# Altium PCB GPS_PCB.PcbDoc
Units mm, origin at the board's own origin, x right, y up, seen from the top; angles counter-clockwise.
Board outline 31.8 x 40.03 mm, 2 copper layers (Top Layer, Bottom Layer); 34 components, 32 nets, 167 pads, 68 vias.
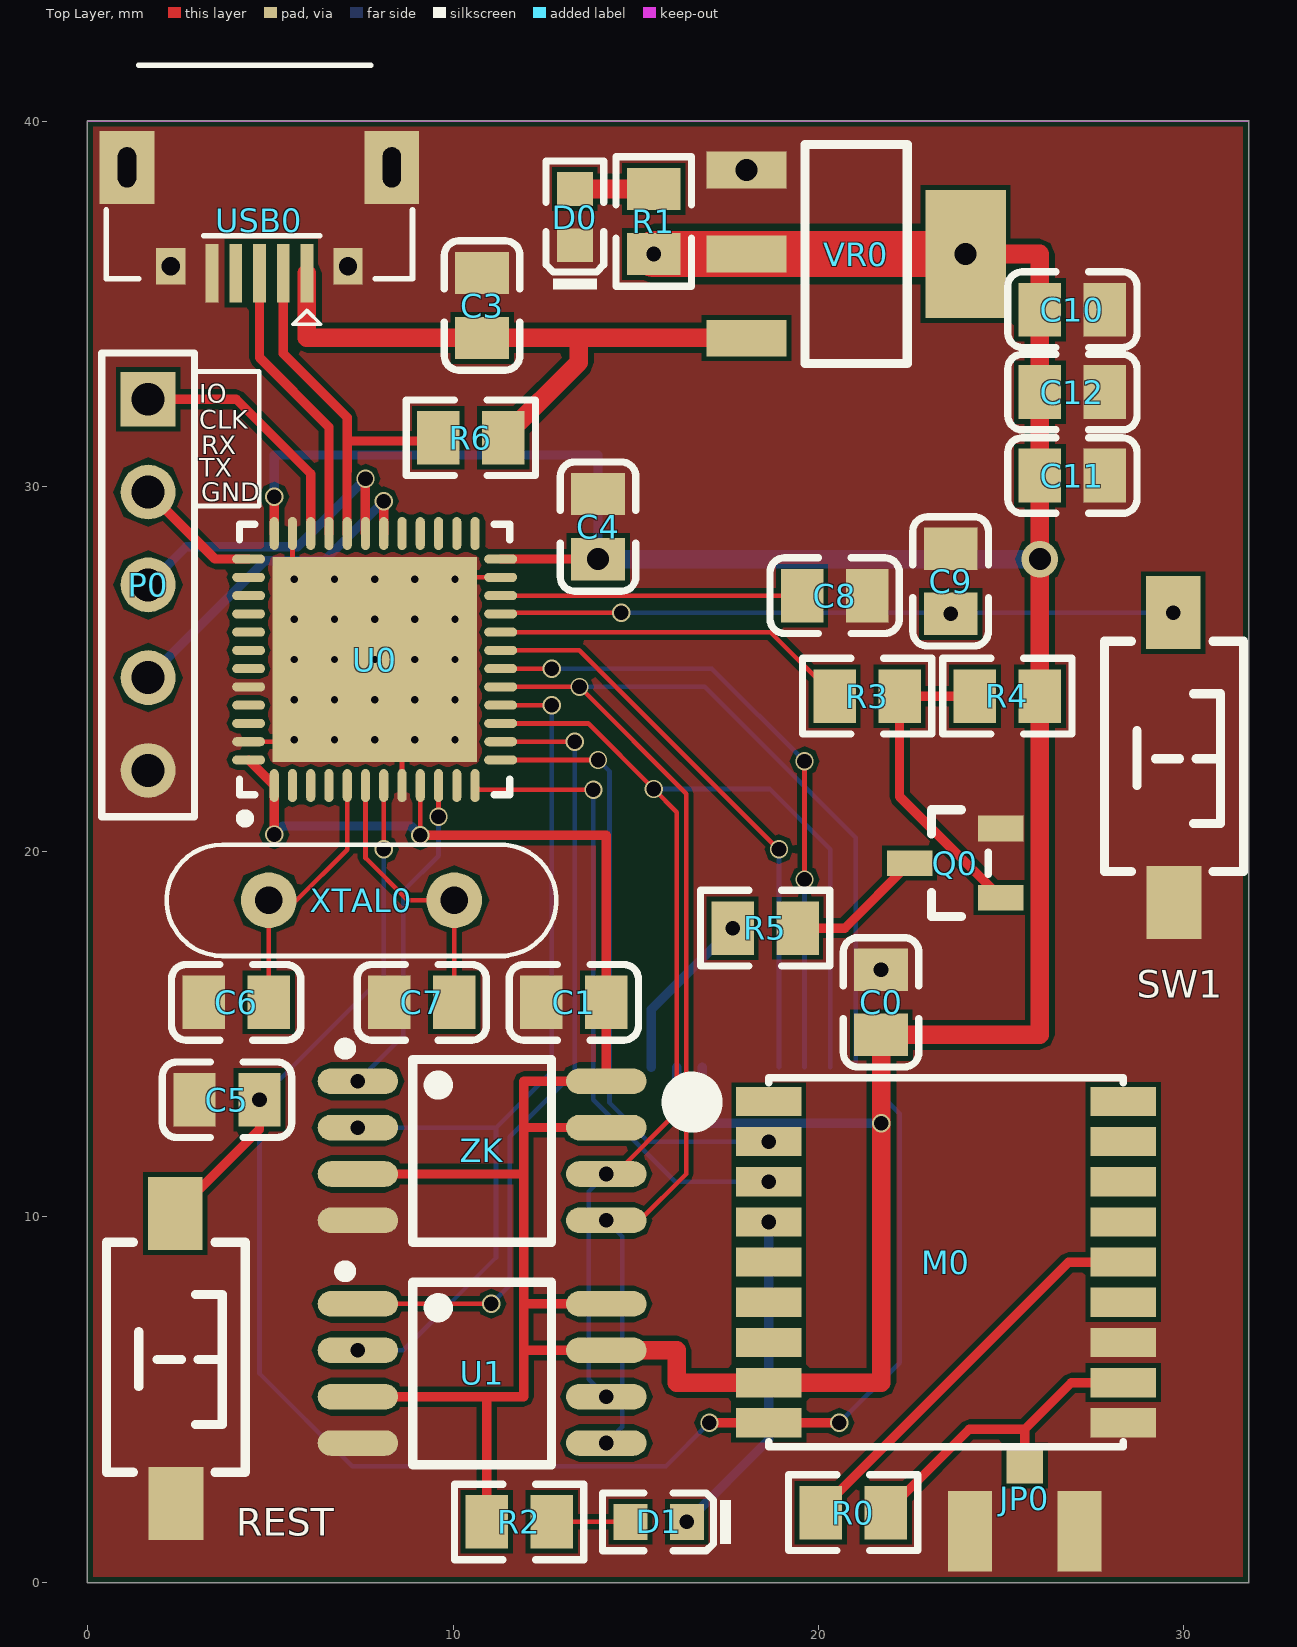
[diagram p0: Top Layer view]
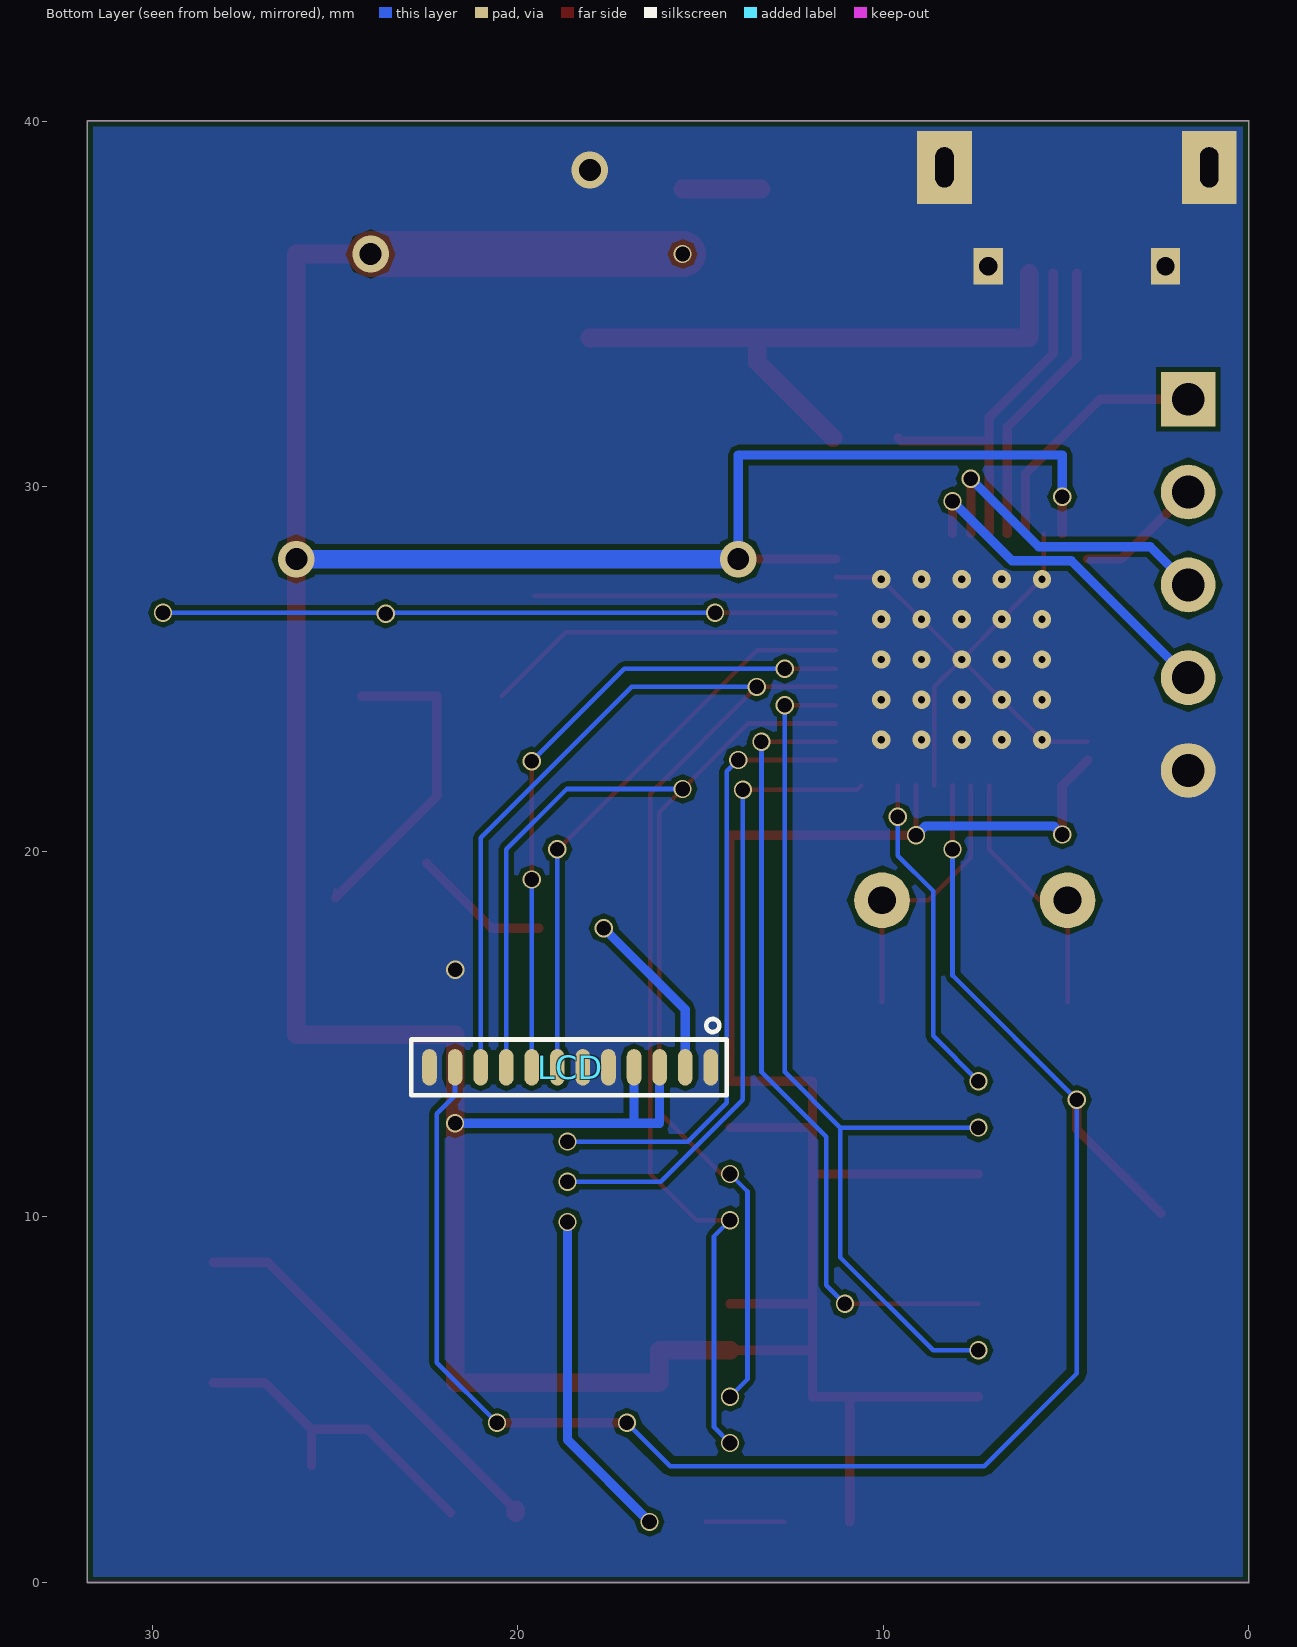
[diagram p1: Bottom Layer view, seen from below]
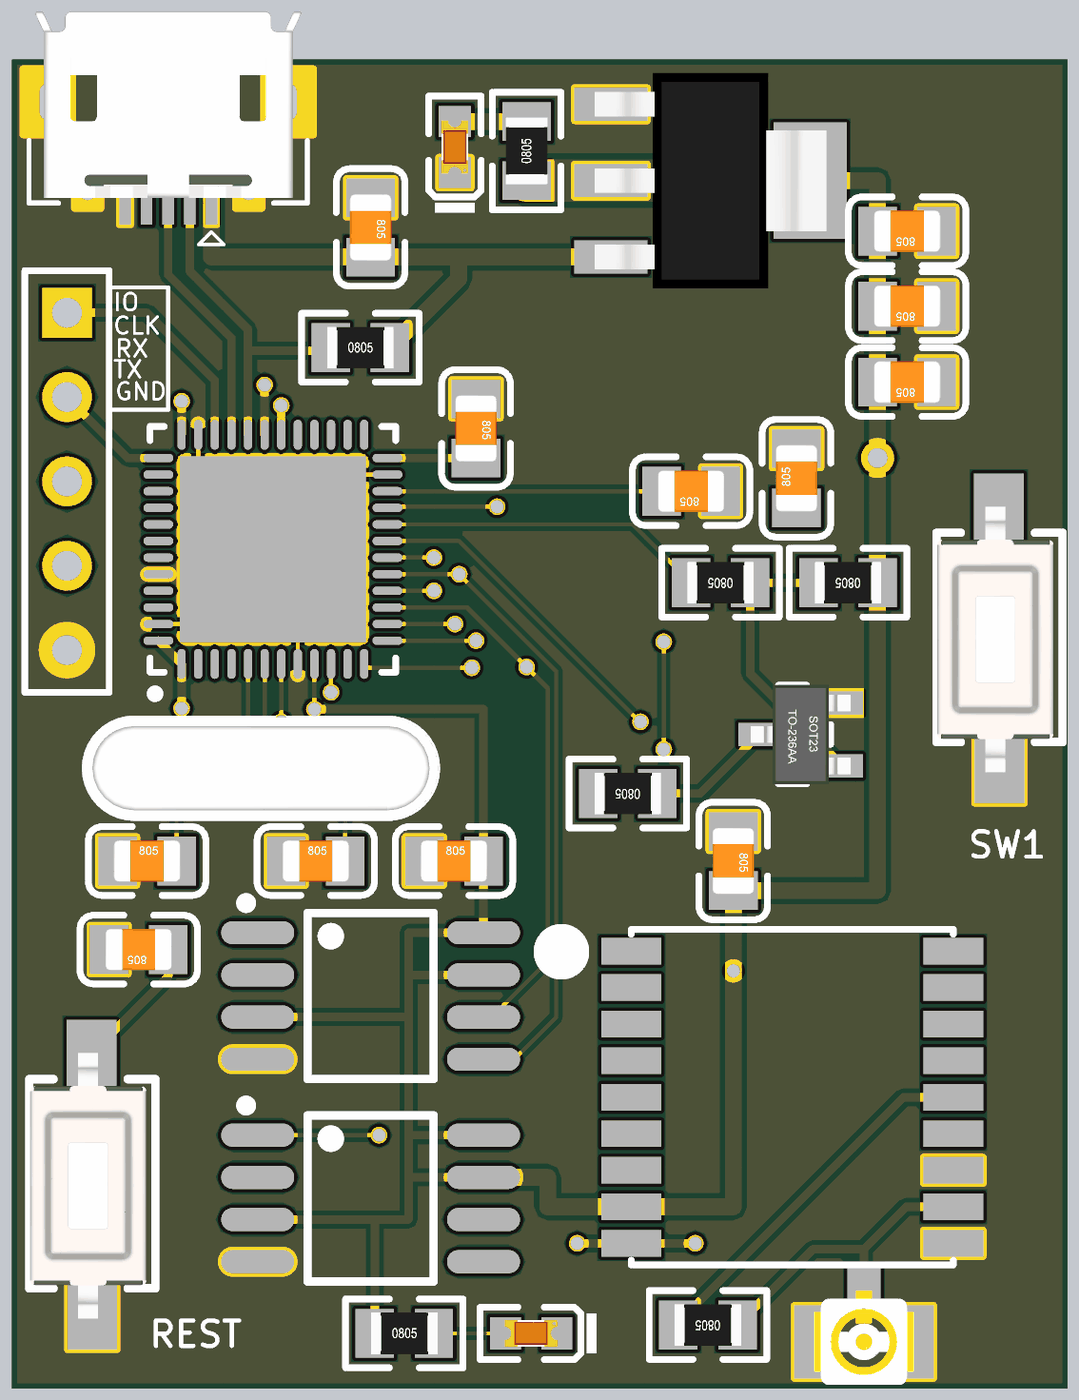
[diagram p2: 3D render of the assembled board from above, using the file's embedded part models]

## Layer stack, top to bottom
Top Solder: solder mask 0.0102, Solder Resist, Dk 3.5
Top Layer: signal copper 0.0356
Dielectric 1: dielectric 0.32, FR-4, Dk 4.8
Bottom Layer: signal copper 0.0356
Bottom Solder: solder mask 0.0102, Solder Resist, Dk 3.5

## Board outline
0,-0.013 cw(c0,0) -0.013,0 -0.013,40 cw(c0,40) 0,40.013 31.778,40.013 cw(c31.778,40) 31.791,40 31.791,0 cw(c31.778,0) 31.778,-0.013

## Design rules (kind name [scope] priority, off if disabled: settings)
Clearance [All] p1: gap=0.127 ignorepadtopadclearanceinfootprint=TRUE
PlaneConnect [All] p1: planeconnectstyle=Direct reliefexpansion=0.508 reliefentries=4 reliefconductorwidth=0.254 reliefairgap=0.254
PolygonConnect [All] p1: connectstyle=Direct reliefconductorwidth=0.254 reliefentries=4 polygonreliefangle="90 Angle" airgapwidth=0.254
RoutingVias [All] p1: holewidth=0.4 width=0.5 viastyle="Through Hole" minholewidth=0.4 minwidth=0.5 maxholewidth=1.5 maxwidth=1
SolderMaskExpansion [All] p1: expansion=0.102
Width [All] p1: maxlimit=1.27 minlimit=0.127 preferedwidth=0.127 minimp=50.000000 maximp=50.000000 favimp=50.000000
29 further rules are at their usual default settings.

## Components (designator, comment, footprint, x,y, rotation, side; value= is the part's Value field where it differs from the comment)
C0 "100n" 0805_C 21.717,15.876 r270 top
C1 "100n" 0805_C 13.305,15.875 r0 top
C3 "100n" 0805_C 10.795,34.953 r270 top
C4 "100n" 0805_C 13.97,28.901 r270 top
C5 "100n" 0805_C 3.81,13.208 r180 top
C6 "20p" 0805_C 4.063,15.875 r0 top
C7 "20p" 0805_C 9.143,15.875 r0 top
C8 "4.7u" 0805_C 20.448,27.011 r180 top
C9 "100n" 0805_C 23.622,27.401 r90 top
C10 "100n" 0805_C 26.956,34.84 r180 top
C11 "100n" 0805_C 26.956,30.297 r180 top
C12 "100n" 0805_C 26.956,32.583 r180 top
D0 "白灯 0603" 0603_LED_S1 13.335,37.373 r90 top
D1 "白灯 0603" 0603_LED_S1 15.629,1.651 r180 top
JP0 "SMA" IPX 25.654,1.397 r180 top
LCD "Header 12" 1.3_inch_LCD 18.223,14.097 r180 bottom
M0 "GP-02" GP-02 23.495,8.763 r0 top
P0 "Header 5" HDR1X5 1.651,32.385 r270 top
Q0 "SS8050 Y1" SOT-23(SOT-23-3) 23.749,19.685 r0 top
R0 "10K" 0805_R 20.955,1.905 r180 top
R1 "390" 0805_R 15.494,37.253 r90 top
R2 "390" 0805_R 11.811,1.651 r0 top
R3 "1K" 0805_R 21.335,24.257 r180 top
R4 "10K" 0805_R 25.175,24.257 r180 top
R5 "10" 0805_R 18.543,17.907 r180 top
R6 "1.5K" 0805_R 10.485,31.332 r0 top
REST "3x6x5" "TSW SMD-3*6*2.5" 2.413,6.096 r270 top (schematic designator SW0)
SW1 "3x6x5" "TSW SMD-3*6*2.5" 29.738,22.547 r270 top
U0 "STM32F401CCU6" STM-UFQFPN48_N 7.853,25.261 r90 top
U1 "W25Q128JVSIQTR" SOIC-8_208mil 10.795,5.715 r270 top
USB0 "USB-5P" USB-MICRO_B 4.699,38.735 r180 top
VR0 "AMS1117-3.3" SOT-223 21.033,36.363 r180 top
XTAL0 "Crystal" XTAL_DIP 4.953,18.669 r0 top
ZK "W25Q128JVSIQTR" SOIC-8_208mil 10.795,11.811 r270 top

## Footprints (in the part's own frame and the unit in brackets; to place one, negate y for a bottom-side part, rotate by r counter-clockwise, add the part's x,y. Pads: shape width x height; smd on the part's side, far side on the other; paste and mask are expansions set on the pad)
1.3_inch_LCD [mm]
  oval 0.4x1 smd: 1(3.5,0) 2(2.8,0) 3(2.1,0) 4(1.4,0) 5(0.7,0) 6(0,0) 7(-0.7,0) 8(-1.4,0) 9(-2.1,0) 10(-2.8,0) 11(-3.5,0) 12(-4.2,0)
  silkscreen extent -4.7,-0.76 3.94,1.32
0603_LED_S1 [mm]
  rect 0.93x0.98 smd: A(0.77,0) K(-0.77,0)
  silkscreen extent -1.98,-0.79 1.54,0.79, body extent -0.8,-0.4 0.8,0.4, height 0.6
0805_C [mm]
  rect 1.16x1.47 smd: 1(-0.89,0) 2(0.89,0)
  silkscreen extent -1.77,-1.04 1.77,1.04, body extent -1,-0.62 1,0.63, height 0.77
0805_R [mm]
  rect 1.16x1.47 smd: 1(-0.89,0) 2(0.89,0)
  silkscreen extent -1.77,-1.04 1.77,1.03, body extent -1,-0.62 1,0.63, height 0.49
GP-02 [mm]
  rect 1.8x0.8 smd: 1(-4.85,4.4) 2(-4.85,3.3) 3(-4.85,2.2) 4(-4.85,1.1) 5(-4.85,0) 6(-4.85,-1.1) 7(-4.85,-2.2) 8(-4.85,-3.3) 9(-4.85,-4.4) 10(4.85,-4.4) 11(4.85,-3.3) 12(4.85,-2.2) 13(4.85,-1.1) 14(4.85,0) 15(4.85,1.1) 16(4.85,2.2) 17(4.85,3.3) 18(4.85,4.4)
  silkscreen extent -7.29,-5.05 4.85,5.05
HDR1X5 [mm] "Connector; Header; 5 Position"
  rect 1.5x1.5 hole 0.9: 1(0,0)
  round 1.5 hole 0.9: 2(2.54,0) 3(5.08,0) 4(7.62,0) 5(10.16,0)
  silkscreen extent -1.27,-1.27 11.43,1.27
IPX [mm]
  rect 1x1 smd: 1(0,-1.8)
  rect 1.2x2.2 smd: 2(-1.5,0) 2(1.5,0)
  body extent -1.5,-1.55 1.5,1.3, height 1.3
SOIC-8_208mil [mm]
  oval 0.7x2.2 smd: 1(-1.905,-3.4) 2(-0.635,-3.4) 3(0.635,-3.4) 4(1.905,-3.4) 5(1.905,3.4) 6(0.635,3.4) 7(-0.635,3.4) 8(-1.905,3.4)
  silkscreen extent -2.95,-3.9 2.5,1.9
SOT-23(SOT-23-3) [mm]
  rect 1.25x0.7 smd: 1(1.25,-0.95) 2(1.25,0.95) 3(-1.25,0)
  silkscreen extent -0.65,-1.46 0.9,1.46, body extent -1.5,-1.5 1.5,1.5, height 1.3
SOT-223 [mm]
  rect 2.2x1 smd: 1(3,-2.3) 2(3,0) 3(3,2.3)
  rect 2.2x3.5 smd: 2(-3,0)
  silkscreen extent -1.4,-3 1.4,3, body extent -3.49,-3.24 3.49,3.24, height 1.64
STM-UFQFPN48_N [mm] "QFN, 48-Leads, Body 7.1x7.1mm, Pitch 0.5mm, Thermal Pad 5.6x5.6mm, IPC Medium Density"
  oval 0.9x0.25 smd: 1(-3.45,2.75) 2(-3.45,2.25) 3(-3.45,1.75) 4(-3.45,1.25) 5(-3.45,0.75) 6(-3.45,0.25) 7(-3.45,-0.25) 8(-3.45,-0.75) 9(-3.45,-1.25) 10(-3.45,-1.75) 11(-3.45,-2.25) 12(-3.45,-2.75) 25(3.45,-2.75) 26(3.45,-2.25) 27(3.45,-1.75) 28(3.45,-1.25) 29(3.45,-0.75) 30(3.45,-0.25) 31(3.45,0.25) 32(3.45,0.75) 33(3.45,1.25) 34(3.45,1.75) 35(3.45,2.25) 36(3.45,2.75)
  oval 0.25x0.9 smd: 13(-2.75,-3.45) 14(-2.25,-3.45) 15(-1.75,-3.45) 16(-1.25,-3.45) 17(-0.75,-3.45) 18(-0.25,-3.45) 19(0.25,-3.45) 20(0.75,-3.45) 21(1.25,-3.45) 22(1.75,-3.45) 23(2.25,-3.45) 24(2.75,-3.45) 37(2.75,3.45) 38(2.25,3.45) 39(1.75,3.45) 40(1.25,3.45) 41(0.75,3.45) 42(0.25,3.45) 43(-0.25,3.45) 44(-0.75,3.45) 45(-1.25,3.45) 46(-1.75,3.45) 47(-2.25,3.45) 48(-2.75,3.45)
  rect 5.6x5.6 smd: 49(0,0)
  silkscreen extent -4.47,-3.7 3.7,3.7, body extent -3.55,-3.55 3.55,3.55, height 0.6
"TSW SMD-3*6*2.5" [mm] "3*6*2.5mm"
  rect 2x1.5 smd: 1(-3.996,-0.02) 2(3.937,0)
  silkscreen extent -3.21,-1.9 3.09,1.9, body extent -4,-1.88 4,1.62, height 2.59
USB-MICRO_B [mm] "micro型USB ，5.7*7.8*2.5mm"
  rect 0.35x1.6 smd: 1(-1.3,2.9) 2(-0.65,2.9) 3(0,2.9) 4(0.65,2.9) 5(1.3,2.9)
  rect 1.5x2 hole 0.5 slot 1.1 at 90 deg: 5(-3.625,0) 5(3.625,0)
  rect 0.8x1 hole 0.5: 5(-2.425,2.71) 5(2.425,2.71)
  silkscreen extent -4.19,-2.79 4.19,4.3, body extent -4,-2.71 4,2.89, height 2.8
XTAL_DIP [mil] "Passive Crystal;DIP;"
  round 60 hole 30: 1(0,0) 2(200,0)
  silkscreen extent -110,-60 310,60, body extent -110,-60 310,60, height 122

## Part data
C0 C1 C3 C4 C5 C9 C10 C11 C12: library part "0805 100nF(104) 10% 50V", "贴片电容", Package=0805, SuppliersPartNumber=C49678, ComponentLink1Description=供应商, ComponentLink1URL=http://www.szlcsc.com/product/details_50686.html, Supplier=LC
C6 C7: library part "0805 20pF (200) 5% 50V", "贴片电容", Package=0805, SuppliersPartNumber=C1798, ComponentLink1Description=供应商, ComponentLink1URL=http://www.szlcsc.com/product/details_2150.html, Supplier=LC
C8: library part "0805 4.7uF (475) 10% 25V", "贴片电容", Package=0805, SuppliersPartNumber=C1779, ComponentLink1Description=供应商, ComponentLink1URL=http://www.szlcsc.com/product/details_2131.html, Supplier=LC
D0 D1: library part "0603 白灯", "发光二极管", Package=0603, SuppliersPartNumber=C2290, ComponentLink1Description=供应商, ComponentLink1URL=http://www.szlcsc.com/product/details_2663.html, Supplier=LC
JP0: "SMA-2.4G射频天线接口", BOM名称=SMA-2.4GÉäÆµÌ, 学习资源=www.ooocke.
LCD: "Header, 12-Pin", LatestRevisionDate=17-Jul-2002, LatestRevisionNote="Re-released for DXP Platform.", Publisher="Altium Limited"
P0: "Header, 5-Pin", LatestRevisionDate=17-Jul-2002, LatestRevisionNote="Re-released for DXP Platform.", Publisher="Altium Limited"
Q0: library part "SOT-23 SS8050 Y1", "三极管", Package=SOT-23, SuppliersPartNumber=C2150, ComponentLink1Description=供应商, ComponentLink1URL=http://www.szlcsc.com/product/details_2507.html, Supplier=LC
R0 R4: library part "0805 10KΩ (1002) 1%", "贴片电阻", Package=0805, SuppliersPartNumber=C17414, ComponentLink1Description=供应商, ComponentLink1URL=http://www.szlcsc.com/product/details_18102.html, Supplier=LC
R1 R2: library part "0805 390Ω (3900) 1%", "贴片电阻", Package=0805, SuppliersPartNumber=C17655, ComponentLink1Description=供应商, ComponentLink1URL=http://www.szlcsc.com/product/details_18343.html, Supplier=LC
R3: library part "0805 1KΩ (1001) 1%", "贴片电阻", Package=0805, SuppliersPartNumber=C17513, ComponentLink1Description=供应商, ComponentLink1URL=http://www.szlcsc.com/product/details_18201.html, Supplier=LC
R5: library part "0805 10Ω (10R0) 1%", "贴片电阻", Package=0805, SuppliersPartNumber=C17415, ComponentLink1Description=供应商, ComponentLink1URL=http://www.szlcsc.com/product/details_18103.html, Supplier=LC
R6: library part "0805 1.5KΩ (1501) 1%", "贴片电阻", Package=0805, SuppliersPartNumber=C4310, ComponentLink1Description=供应商, ComponentLink1URL=http://www.szlcsc.com/product/details_4717.html, Supplier=LC
REST SW1: library part "TSW 3x6", "3x6轻触开关", BOM名称=3x6Çá´, 学习资源=www.ooocke.
U0: "ARM Cortex-M4 32-bit MCU+FPU, 105 DMIPS, 256 kB Flash, 64 kB Internal RAM, 36 I/Os, 48-pin UFQFPN, -40 to 85 degC, Tray", I/Os (High Current)=36, Manufacturer=STMicroelectronics, Operating Frequency(F) (Processor speed) (MHz)=84, Supplier Part Number 1=19X6217, Supply Voltage(Vcc) max (V)=3.6, Supply Voltage(Vcc) min (V)=1.8, ComponentLink1Description="Manufacturer URL", ComponentLink1URL=http://www.st.com/web/en/home.html, ComponentLink2Description=Datasheet, ComponentLink2URL=http://www.st.com/st-web-ui/static/active/en/resource/technical/document/data_brief/DM00071938.pdf, ComponentLink3Description="Package Specification", ComponentLink3URL=http://www.st.com/st-web-ui/static/active/en/resource/technical/document/data_brief/DM00071938.pdf, Core="ARM Cortex-M4", DatasheetVersion="Rev. 1", FLASH Size (Prog) (kB)=256, Internal RAM Size (kB)=64, Mounting Technology="Surface Mount", PackageDescription="48-Pin Ultra Thin Fine Pitch Quad Flat No-Lead, 7 x 7 x 0.6 mm Body, 0.5 mm Pitch, Exposed Pad", PackageReference=UFQFPN48, PackageVersion="Rev. 1, 04/2013", Packing=Tray, PartNumber=STM32F401CCU6, Supplier 1=Newark, Supplier 2=Mouser, Supplier Part Number 2=511-STM32F401CCU6
U1 ZK: library part W25Q128JVSIQTR_[C97521], "Flash ROM", Package=SOIC-8, SuppliersPartNumber=C97521, ComponentLink1Description=供应商, ComponentLink1URL=https://item.szlcsc.com/98729.html, Supplier=LC
USB0: "微型USB母座", BOM名称=微型US, 学习资源=www.ooocke.
VR0: library part "SOT-223 AMS1117-3.3", "低压差线性稳压(LDO)", Package=SOT-223, SuppliersPartNumber=C6186, ComponentLink1Description=供应商, ComponentLink1URL=http://www.szlcsc.com/product/details_6652.html, Supplier=LC
XTAL0: library part XTAL, "Crystal without source", Frequence=8M

## Via types
v1: diameter 0.5, hole 0.4, Top Layer to Bottom Layer, 39 vias
v2: diameter 0.5, hole 0.2, Top Layer to Bottom Layer, 25 vias
v3: diameter 1, hole 0.6, Top Layer to Bottom Layer, 4 vias

## Nets (pads, with @x,y where several pads share a name; then routed paths per layer and width w, separated by ;. In a path a pad name is that pad's centre, name@x,y a point inside that pad or via, vN(x,y) a via of type N, cw(c..) or ccw(c..) an arc to the next point about the centre after c; other vN are vias at no path point)
3.3V: C0.2 C1.2 C4.2 C10.2 C11.2 C12.2 LCD.3 LCD.4 M0.8 R1.1 R2.1 R4.1 U0.1 U0.9 U0.24 U0.36 U0.48 U1.3 U1.7 U1.8 VR0.2 ZK.3 ZK.7 ZK.8 | length 141.4
  Top Layer w0.127: v1(9.103,20.447) U0.9
  Top Layer w0.254: U0.48 U0.1 v1(5.103,20.47) ; U0.36 v1(5.103,29.718) ; U1.3 10.922,5.08 ; ZK.3 11.938,11.176 ; v1(9.103,20.447) 14.195,20.447 C1.2 ZK.8 11.938,13.716 11.938,12.446 ; R2.1 10.921,5.079 10.922,5.08 ; U0.24 v3(13.97,28.011) ; U1.7 11.938,6.35 ; U1.8 11.938,7.62 ; ZK.7 11.938,12.446 ; 10.922,5.08 11.938,5.08 11.938,6.35 ; 11.938,6.35 11.938,7.62 ; 11.938,7.62 11.938,11.176 ; 11.938,11.176 11.938,12.446
  Top Layer w0.508: U1.7 16.129,6.35 16.129,5.463 M0.8 21.717,5.463 21.723,5.469 v1(21.723,12.567) 21.723,14.98 C0.2 26.065,14.986 R4.1 26.065,36.363 v3(24.033,36.363)
  Top Layer w1.27: v1(15.494,36.363) 18.033,36.363 v3(24.033,36.363)
  Bottom Layer w0.254: v1(5.103,20.47) 5.334,20.701 8.849,20.701 v1(9.103,20.447) ; v1(5.103,29.718) 5.103,30.861 13.97,30.861 v3(13.97,28.011) ; LCD.3 16.123,12.567 16.764,12.567 ; LCD.4 16.823,12.626 16.764,12.567 ; v1(21.723,12.567) 16.764,12.567
  Bottom Layer w0.508: v3(13.97,28.011) v3(26.065,28.011)
+5: C3.2 R6.2 USB0.1 VR0.3 | length 17.4
  Top Layer w0.508: USB0.1 5.999,34.066 13.445,34.066 ; R6.2 13.445,33.402 13.445,34.066 ; VR0.3 18.03,34.066 13.445,34.066
ANT: JP0.1 M0.11 R0.1 | length 9
  Top Layer w0.254: R0.1 24.131,4.191 25.654,4.191 ; JP0.1 25.654,4.191 ; M0.11 26.926,5.463 25.654,4.191
BLK: R3.2 U0.20 | length 9.9
  Top Layer w0.127: U0.20 18.691,26.011 R3.2
D/C: LCD.7 U0.19 | length 15.8
  Top Layer w0.127: U0.19 13.456,25.511 v1@18.912,20.055
  Bottom Layer w0.127: LCD.7 v1(18.923,20.066)
FLASH_CS: U0.14 U1.1 | length 22
  Top Layer w0.127: U1.1 v1(11.049,7.62) ; U0.14 v1(13.335,23.011)
  Bottom Layer w0.127: v1(11.049,7.62) 11.557,8.128 11.557,12.192 13.335,13.97 v1(13.335,23.011)
GND: C0.1 C1.1 C3.1 C4.1 C5.2 C6.1 C7.1 C8.1 C9.2 C10.1 C11.1 C12.1 D0.K JP0.2 LCD.1 LCD.5 LCD.6 LCD.12 M0.10 M0.12 P0.5 Q0.2 REST.2 SW1.2 U0.8 U0.23 U0.35 U0.44 U0.47 U0.49 U1.4 USB0.5 VR0.1 ZK.4 | length 16.9
  Top Layer w0.127: U0.47 5.603,23.011 v2(5.653,23.061) v2(6.753,24.161) v2(7.853,25.261) ; U0.35 5.603,27.511 v2(6.753,26.361) v2(7.853,25.261) ; U0.8 8.603,24.511 v2(7.853,25.261) ; U0.23 10.103,27.511 v2(10.053,27.461) v2(8.953,26.361) v2(7.853,25.261)
  other v1: 21.717,16.766
  other v2: 6.753,23.061 7.853,23.061 8.953,23.061 10.053,23.061 5.653,24.161 7.853,24.161 8.953,24.161 10.053,24.161 5.653,25.261 6.753,25.261 8.953,25.261 10.053,25.261 5.653,26.361 7.853,26.361 10.053,26.361 5.653,27.461 6.753,27.461 7.853,27.461 8.953,27.461
  other v3: 18.033,38.663
LCD_CS: LCD.8 U0.18 | length 17.7
  Top Layer w0.127: U0.18 v1(12.7,25.011) ; v1(19.623,19.239) v1(19.623,22.476)
  Bottom Layer w0.127: v1(12.7,25.011) 17.088,25.011 v1(19.623,22.476) ; LCD.8 v1(19.623,19.239)
LEDK: LCD.2 R5.2 | length 4.7
  Bottom Layer w0.254: LCD.2 15.423,15.677 v1(17.653,17.907)
NetC8_2: C8.2 U0.22 | length 8.3
  Top Layer w0.127: U0.22 C8.2
NetD0_A: D0.A R1.2 | length 2.2
  Top Layer w0.508: D0.A R1.2
NetD1_A: D1.A R2.2 | length 2.2
  Top Layer w0.127: R2.2 D1.A
NetQ0_1: Q0.1 R3.1 R4.2 | length 8.9
  Top Layer w0.127: Q0.1 Q0.1@24.999,18.943
  Top Layer w0.254: R4.2 R3.1 22.225,21.509 Q0.1
NetQ0_3: Q0.3 R5.1 | length 3.8
  Top Layer w0.254: R5.1 20.721,17.907 Q0.3
NRST: C5.1 LCD.11 M0.9 REST.1 U0.7 | length 49.6
  Top Layer w0.127: v1(8.103,20.066) U0.7
  Top Layer w0.254: REST.1 4.7,12.399 v1(4.7,13.208) ; v1(17.018,4.363) M0.9 v1(20.574,4.363)
  Bottom Layer w0.127: v1(8.103,20.066) 8.103,16.611 v1(4.7,13.208) 4.7,5.714 7.239,3.175 15.83,3.175 v1(17.018,4.363) ; v1(20.574,4.363) 22.225,6.014 22.225,12.827 21.723,13.329 LCD.11
OSC_IN: C6.2 U0.5 XTAL0.1 | length 7.3
  Top Layer w0.127: C6.2 XTAL0.1 5.714,18.669 7.103,20.058 U0.5
OSC_OUT: C7.2 U0.6 XTAL0.2 | length 7.7
  Top Layer w0.127: U0.6 7.603,19.829 8.763,18.669 XTAL0.2 C7.2
PSS: D1.K M0.4 | length 9.1
  Bottom Layer w0.254: v1(16.399,1.651) 18.645,3.897 v1(18.645,9.863)
SPI1_MISO: U0.16 U1.2 ZK.2 | length 25.8
  Top Layer w0.127: U0.16 v1(12.7,24.011)
  Bottom Layer w0.127: v1(7.395,6.35) 8.636,6.35 11.176,8.89 11.176,12.446 ; v1(7.395,12.446) 11.176,12.446 ; v1(12.7,24.011) 12.7,13.97 11.176,12.446
SPI1_MOSI: LCD.10 U0.17 U1.5 ZK.5 | length 41.4
  Top Layer w0.127: U0.17 v1(13.462,24.511) 16.383,21.59 16.383,11.176 15.113,9.906 v1(14.195,9.906)
  Bottom Layer w0.127: v1(13.462,24.511) 16.891,24.511 21.023,20.379 LCD.10 ; v1(14.195,3.81) 14.636,4.25 14.636,9.465 v1(14.195,9.906)
SPI1_SCK: LCD.9 U0.15 U1.6 ZK.6 | length 34.7
  Top Layer w0.127: U0.15 13.7,23.511 v1(15.494,21.717) 16.129,21.082 16.129,12.866 14.439,11.176 v1(14.195,11.176)
  Bottom Layer w0.127: v1(14.195,5.08) 13.716,5.559 13.716,10.697 v1(14.195,11.176) ; v1(15.494,21.717) 18.669,21.717 20.323,20.063 LCD.9
SW1: C9.1 SW1.1 U0.21 | length 18.4
  Top Layer w0.127: U0.21 11.335,26.543 v1(14.605,26.543)
  Bottom Layer w0.127: v1(14.605,26.543) v1(29.718,26.543)
  other v1: 23.622,26.511
SWDCLK: P0.2 U0.37 | length 3.5
  Top Layer w0.254: P0.2 3.485,28.011 U0.37
SWDIO: P0.1 U0.34 | length 6.9
  Top Layer w0.254: P0.1 4.064,32.385 6.103,30.346 U0.34
USART1_RX: P0.3 U0.31 | length 8.7
  Top Layer w0.254: U0.31 7.599,28.715 7.599,30.205 v1(7.603,30.209)
  Bottom Layer w0.254: P0.3 2.692,28.346 5.74,28.346 v1(7.603,30.209)
USART1_TX: P0.4 U0.30 | length 9.3
  Top Layer w0.254: U0.30 v1(8.103,29.591)
  Bottom Layer w0.254: P0.4 4.851,27.965 6.477,27.965 v1(8.103,29.591)
USART2_RX: M0.2 U0.13 | length 17
  Top Layer w0.127: U0.13 v1(13.97,22.511)
  Bottom Layer w0.127: v1(13.97,22.511) 14.283,22.198 14.283,13.127 15.347,12.063 v1(18.645,12.063)
USART2_TX: M0.3 U0.12 | length 17.5
  Top Layer w0.127: U0.12 10.719,21.695 v1(13.843,21.695)
  Bottom Layer w0.127: v1(13.843,21.695) 13.843,13.208 16.088,10.963 v1(18.645,10.963)
USB_FS_DM: R6.1 U0.32 USB0.2 | length 10.4
  Top Layer w0.254: USB0.2 5.349,33.639 7.103,31.885 7.103,31.242 ; U0.32 7.099,28.715 7.099,30.418 7.103,30.422 7.103,31.242 ; R6.1 9.505,31.242 7.103,31.242
USB_FS_DP: U0.33 USB0.3 | length 7.9
  Top Layer w0.254: USB0.3 4.699,33.528 6.603,31.624 U0.33
VCC_RF: M0.14 R0.2 | length 11.2
  Top Layer w0.254: R0.2@20.065,1.979 26.849,8.763 M0.14
  Top Layer w0.508: R0.2 R0.2@20.065,1.979
ZK_CS: U0.10 ZK.1 | length 9
  Top Layer w0.127: v1(9.603,20.955) U0.10
  Bottom Layer w0.127: v1(7.395,13.716) 8.636,14.957 8.636,18.923 9.603,19.89 v1(9.603,20.955)
pads on no net: M0.1 M0.5 M0.6 M0.7 M0.13 M0.15 M0.16 M0.17 M0.18 U0.2 U0.3 U0.4 U0.11 U0.25 U0.26 U0.27 U0.28 U0.29 U0.38 U0.39 U0.40 U0.41 U0.42 U0.43 U0.45 U0.46 USB0.4

## Polygon pours and split planes (outlines as drawn)
GND on Bottom Layer "GND_L02_P002" (solid, remove dead copper, pour order 2): 0,40.005 31.773,40.005 31.778,40 31.778,0 0,0
GND on Top Layer "GND_L01_P000" (solid, remove dead copper, pour order 0): 0,40 31.778,40 31.778,0 0,0

## Keep-outs
Keep-Out Layer:
  lines w0.025: 0,0 0,40 31.778,40 31.778,0 0,0

## Silkscreen, mask and mechanical layers (free items; w line width, h text height)
Top Overlay:
  lines w0.127: 2.921,29.464 4.699,29.464 4.699,33.147 2.921,33.147
  text "IO" at 3.048,32.284 h0.51
  text "CLK" at 3.048,31.579 h0.51
  text "RX" at 3.105,30.887 h0.51
  text "TX" at 3.048,30.259 h0.51
  text "GND" at 3.105,29.598 h0.51